# EAGLE board Template_PiggyBack (EAGLE 9.6.2)
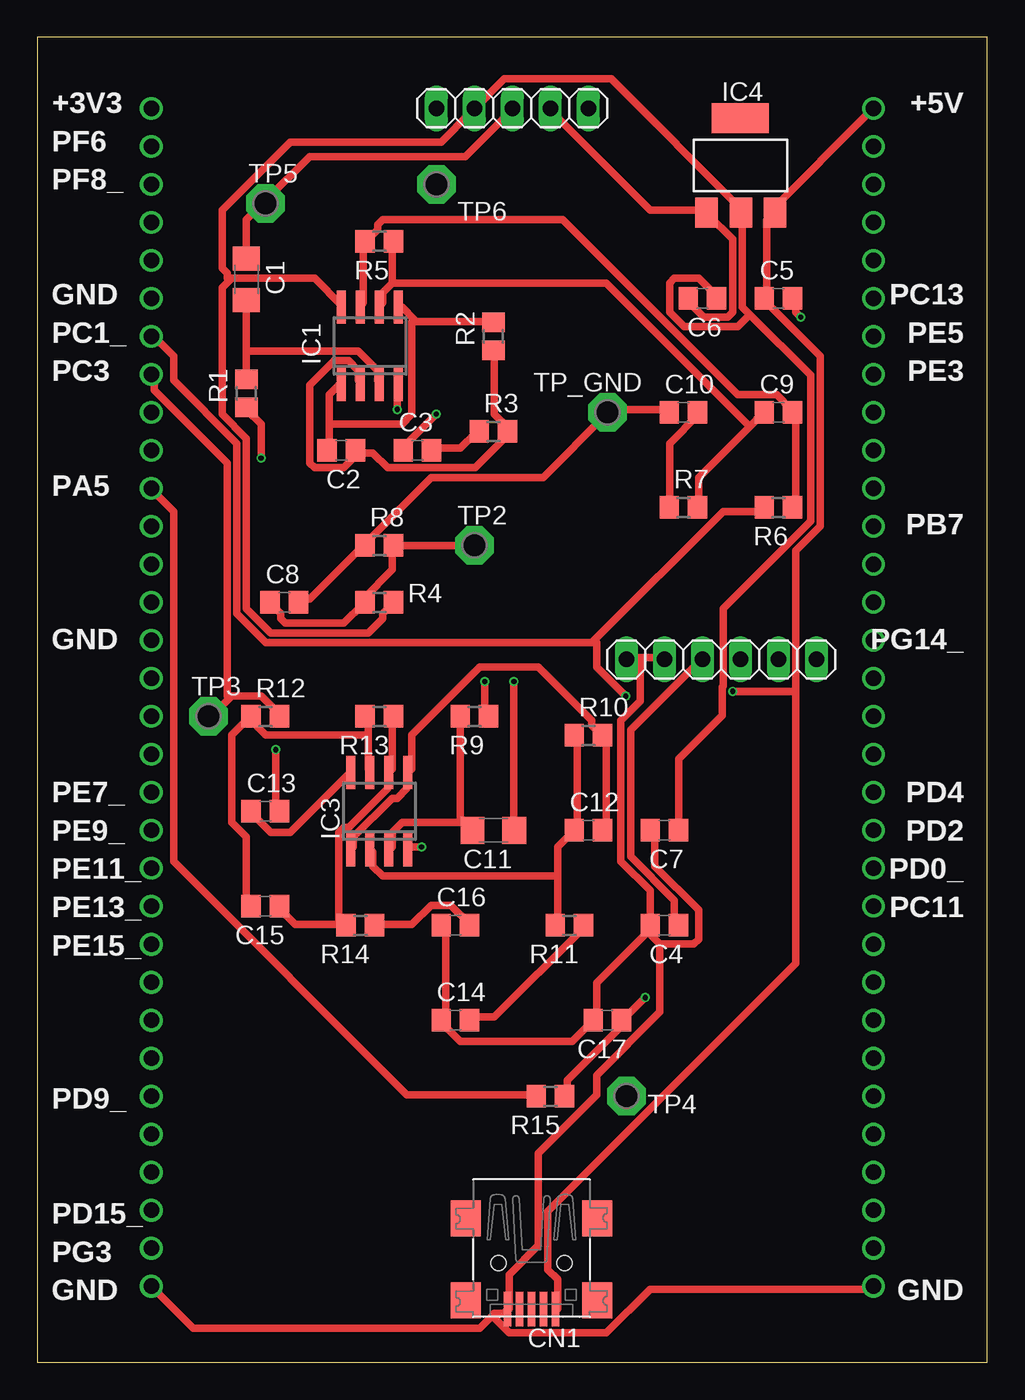
[diagram p0: board, top side]
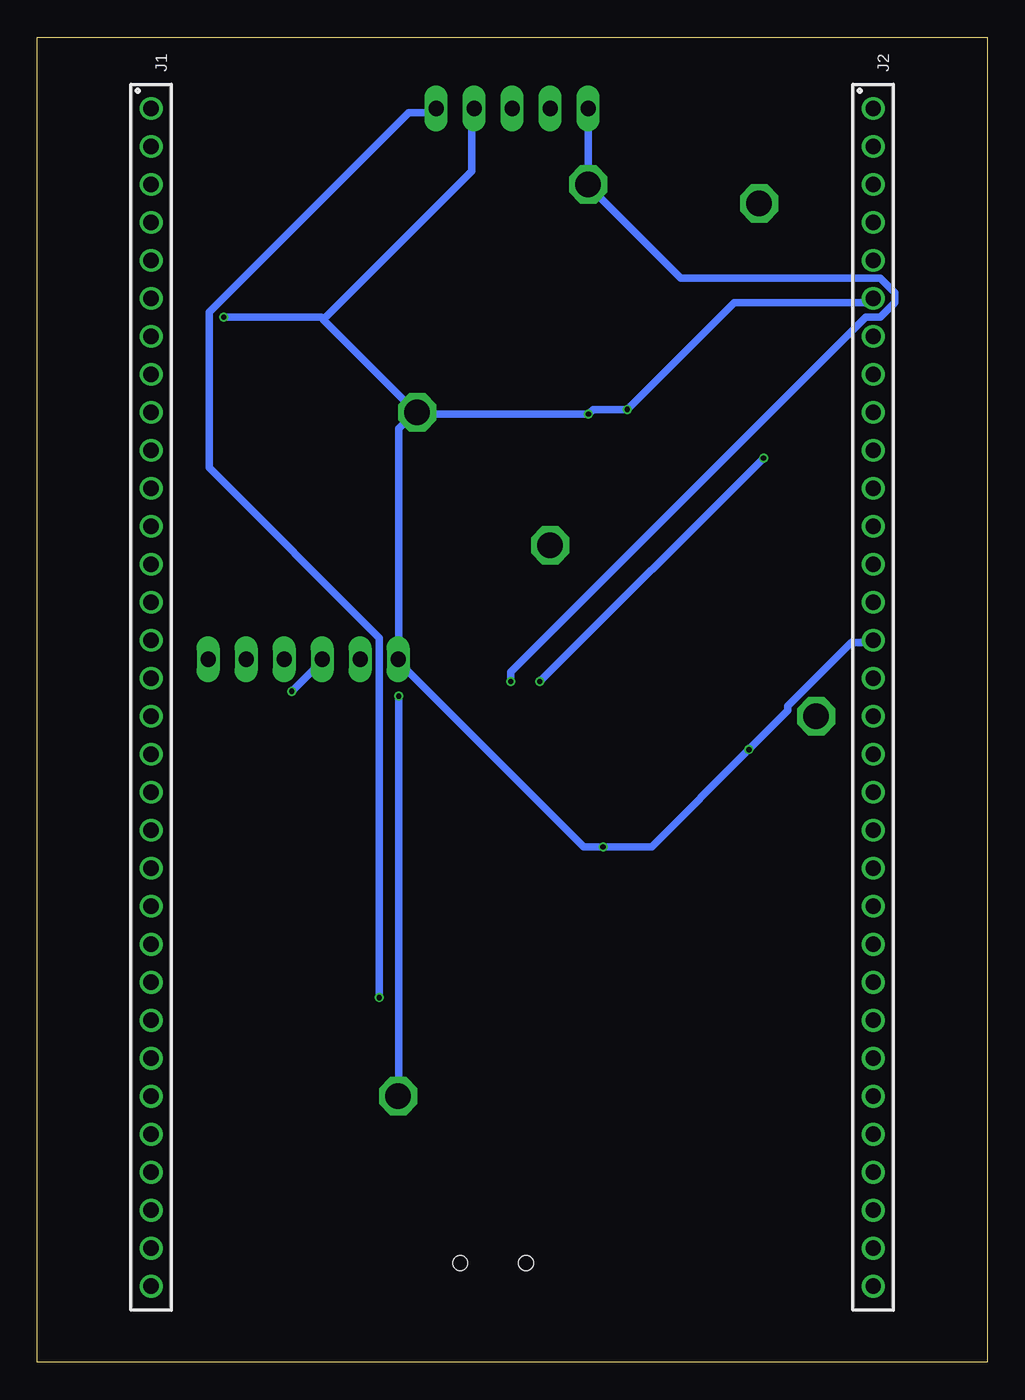
[diagram p1: board, bottom side, seen from below]

Size 63.48 x 88.57 mm. Coordinates in mm from the lower left corner, seen from the top.
Outline: 0,0 63.48,0 63.48,88.57 0,88.57 0,0
Copper layers (1*16): Top 0.018mm / dielectric 1.55mm / Bottom 0.018mm
Design rules "default *": minimum track width 0.5mm, minimum drill 0.35mm, track to track 0.15mm, track to pad 0.15mm, pad to pad 0.15mm, via to via 0.15mm, smd to smd 0mil, copper to edge 0.25mm, drill to drill 0.35mm, minimum pad ring 0.175mm, minimum via ring 0.125mm, stop-mask expansion 0mil, vias tented up to drill 0.45mm, thermal gap 0.2mm
bKeepout: area 3.8,3.8 to 5.8,85.1; area 57.7,3.8 to 59.7,85.1

## Footprints (pad centres in the part's own frame; a part is rotated, then mirrored left to right if it is on the bottom)
C1206 = smd 1.6 x 1.8: 1 -1.4,0; 2 1.4,0
C0805 = smd 1.3 x 1.5: 1 -0.95,0; 2 0.95,0
USB-MINIB = smd 0.5 x 2.308: D+ 0,4.064; D- -0.8,4.064; GND 1.6,4.064; ID 0.8,4.064; VBUS -1.6,4.064 | smd 2 x 2.4: GND1 -4.4,-2; GND2 -4.4,3.5; GND3 4.4,3.5; GND4 4.4,-2 | hole 1: -2.2,1; 2.2,1
SO08 = smd 0.6 x 2.2: 1 -1.905,-2.6; 2 -0.635,-2.6; 3 0.635,-2.6; 4 1.905,-2.6; 5 1.905,2.6; 6 0.635,2.6; 7 -0.635,2.6; 8 -1.905,2.6
SOT223 = smd 1.499 x 2.007: 1 -2.261,-3.15; 2 0.025,-3.15; 3 2.311,-3.15 | smd 3.81 x 2.007: 4 0,3.15
61303211821 = drill 1.02: 1 -39.37,0; 2 -36.83,0; 3 -34.29,0; 4 -31.75,0; 5 -29.21,0; 6 -26.67,0; 7 -24.13,0; 8 -21.59,0; 9 -19.05,0; 10 -16.51,0; 11 -13.97,0; 12 -11.43,0; 13 -8.89,0; 14 -6.35,0; 15 -3.81,0; 16 -1.27,0; 17 1.27,0; 18 3.81,0; 19 6.35,0; 20 8.89,0; 21 11.43,0; 22 13.97,0; 23 16.51,0; 24 19.05,0; 25 21.59,0; 26 24.13,0; 27 26.67,0; 28 29.21,0; 29 31.75,0; 30 34.29,0; 31 36.83,0; 32 39.37,0
1X05 = drill 1.016 long: 1 -5.08,0; 2 -2.54,0; 3 0,0; 4 2.54,0; 5 5.08,0
1X06 = drill 1.016 long: 1 -6.35,0; 2 -3.81,0; 3 -1.27,0; 4 1.27,0; 5 3.81,0; 6 6.35,0
R0805 = smd 1.3 x 1.5: 1 -0.95,0; 2 0.95,0
P1-17 = drill 1.702 pad 2.54 octagon: TP 0,0

## Placement (x,y rotation side)
C1  22n  [C1206]  13.97,72.39 270 top
C2  4.7n  [C0805]  20.32,60.96 180 top
C3  22µ  [C0805]  25.4,60.96 0 top
C4  1u  [C0805]  41.91,29.21 180 top
C5  10u  [C0805]  49.53,71.12 0 top
C6  10u  [C0805]  44.45,71.12 180 top
C7  100n  [C0805]  41.91,35.56 180 top
C8  10µ  [C0805]  16.51,50.8 0 top
C9  4.7n  [C0805]  49.53,63.5 0 top
C10  22µ  [C0805]  43.18,63.5 0 top
C11  22n  [C1206]  30.48,35.56 180 top
C12  4.7n  [C0805]  36.83,35.56 0 top
C13  100n  [C0805]  15.24,36.83 0 top
C14  22µ  [C0805]  27.94,22.86 0 top
C15  4.7n  [C0805]  15.24,30.48 180 top
C16  22µ  [C0805]  27.94,29.21 0 top
C17  1u  [C0805]  38.1,22.86 180 top
CN1  USB power supply  [USB-MINIB]  33.02,7.62 180 top
IC1  MCP6002  [SO08]  22.23,67.94 0 top
IC3  MCP6002  [SO08]  22.86,36.83 0 top
IC4  REG1117  [SOT223]  46.99,80.01 0 top
J1  [61303211821]  55.88,44.45 270 bottom
J2  [61303211821]  7.62,44.45 270 bottom
JP5  Radar K-LC5-RFB-00C  [1X05]  31.75,83.82 0 top
JP8  OpenLog extension  [1X06]  45.72,46.99 180 top
R1  100k  [R0805]  13.97,64.77 90 top
R2  3.3k  [R0805]  30.48,68.58 90 top
R3  100  [R0805]  30.48,62.23 0 top
R4  3k  [R0805]  22.86,50.8 0 top
R5  3.3k  [R0805]  22.86,74.93 180 top
R6  100  [R0805]  49.53,57.15 180 top
R7  100  [R0805]  43.18,57.15 0 top
R8  3k  [R0805]  22.86,54.61 0 top
R9  100k  [R0805]  29.21,43.18 180 top
R10  3.3k  [R0805]  36.83,41.91 0 top
R11  100  [R0805]  35.56,29.21 180 top
R12  100  [R0805]  15.24,43.18 0 top
R13  3.3k  [R0805]  22.86,43.18 180 top
R14  100  [R0805]  21.59,29.21 180 top
R15  3k  [R0805]  34.29,17.78 180 top
TP2  PTR1PAD1-17  [P1-17]  29.21,54.61 0 top
TP3  PTR1PAD1-17  [P1-17]  11.43,43.18 0 top
TP4  PTR1PAD1-17  [P1-17]  39.37,17.78 0 top
TP5  PTR1PAD1-17  [P1-17]  15.24,77.47 0 top
TP6  PTR1PAD1-17  [P1-17]  26.67,78.74 0 top
TP_GND  PTR1PAD1-17  [P1-17]  38.1,63.5 0 top

## Library data of the parts
C1-C17 = rcl; SPICEPREFIX: C
CN1 = adafruit
IC1 IC3 = linear
IC4 = burr-brown; MPN: REG1117; OC_FARNELL: 1097566; OC_NEWARK: 14P6981
J1 J2 = Wurth_Connectors_WR-PHD; DATASHEET-URL: https://katalog.we-online.com/em/datasheet/61303211821.pdf; GENDER: Socket Header; IR: 3A; MATES: WR-PHD 2.54mm SMT Pin Header/THT Angled Pin Header/THT Pin Header; PACKAGING: Tray; PART-NUMBER: 61303211821; PINS: 32; ROWS: Single; TYPE: Straight
JP5 JP8 = pinhead
R1-R15 = rcl; SPICEPREFIX: R
TP2-TP6 TP_GND = testpad

## Nets
+3.3V_FROM_UC: J2.1
+3V3: C6.1 C7.1 IC1.8 IC4.2 JP5.2 R4.2
+5V: C4.1 C5.1 CN1.VBUS IC4.3 J1.1 JP8.4
GND: C3.1 C4.2 C5.2 C6.2 C7.2 C8.2 C10.1 C13.2 C14.1 C16.1 C17.2 CN1.GND IC1.4 IC3.4 IC4.1 J1.32 J2.6 J2.15 J2.32 JP5.4 JP8.5 JP8.6 R8.1 TP_GND.TP
IF_I: C1.1 JP5.3 TP5.TP
IF_Q: C11.1 JP5.1 TP6.TP
N$1: C3.2 R3.1
N$2: C2.1 IC1.2 R2.1 R3.2
N$3: C10.2 R7.1
N$4: C1.2 IC1.3 R1.2
N$5: C2.2 IC1.1 IC1.5 R2.2
N$6: C8.1 R4.1 R8.2 TP2.TP
N$7: C9.2 IC1.7 R5.2 R6.1
N$8: C9.1 IC1.6 R5.1 R7.2
N$9: C12.1 IC3.2 R10.1 R11.2
N$10: C16.2 R14.1
N$11: C11.2 IC3.3 R9.2
N$12: C12.2 IC3.1 IC3.5 R10.2
N$13: C15.2 IC3.7 R12.1 R13.2
N$14: C15.1 IC3.6 R13.1 R14.2
N$15: C14.2 R11.1
PA5: J2.11 R15.2
PA9: JP8.2
PA10: JP8.3
PB7: J1.12
PC1_: J2.7 R6.2 TP4.TP
PC3: J2.8 R12.2 TP3.TP
PC11: J1.22
PC13: J1.6
PD0_: J1.21
PD2: J1.20
PD4: J1.19
PD9_: J2.27
PD15_: J2.30
PE3: J1.8
PE5: J1.7
PE6: JP8.1
PE7_: J2.19
PE9_: J2.20
PE11_: J2.21
PE13_: J2.22
PE15_: J2.23
PF6: J2.2
PF8_: J2.3
PG3: J2.31
PG14_: J1.15
V_GND: R1.1 R9.1
VCC: C13.1 IC3.8
VCO: C17.1 JP5.5 R15.1

## Tracks (layer width: path | path; a pad name or v marks a point on that pad's centre or on a via)
+3V3
  Top 0.5: 12.84,72.31 13,72.47 18.52,72.47 20.32,70.68 IC1.8 | 12.84,72.31 12.35,71.83 12.35,63.38 13.97,61.75 13.97,50.38 15.6,48.75 22.1,48.75 23.07,49.73 23.07,50.05 23.73,50.7 R4.2 | 47.61,70.04 47.12,70.53 47.12,76.7 IC4.2 47.12,77.03 38.35,85.8 31.2,85.8 29.25,83.85 JP5.2 28.93,83.53 26.98,81.58 16.9,81.58 12.35,77.03 12.35,73.12 12.68,72.8 12.68,72.47 12.84,72.31 | 47.61,70.04 51.67,65.97 51.67,56.23 45.83,50.38 45.83,45.19 45.77,45.14 45.77,43.23 42.86,40.32 C7.1 | 47.61,70.04 46.8,69.22 43.23,69.22 42.25,70.2 42.25,72.15 42.58,72.47 44.2,72.47 45.17,71.5 45.17,71.17 C6.1
+5V  (via drill 0.35)
  Top 0.5: C4.1 42.58,29.25 42.58,30.88 39.65,33.8 39.65,42.25 44.2,46.8 JP8.4 | 50.7,44.85 50.7,54.27 52.33,55.9 52.33,67.28 48.75,70.85 C5.1 48.75,71.17 48.75,76.38 49.08,76.7 IC4.3 49.08,77.03 55.58,83.53 J1.1 | 50.7,44.85 50.7,26.65 34.12,10.07 34.12,6.17 34.77,5.53 34.77,3.58 CN1.VBUS | 50.7,44.85 v46.48,44.85
  Bottom 0.5: v46.48,44.85 44.52,46.8 JP8.4
GND  (via drill 0.35)
  Top 0.5: 30.39,3.09 29.57,2.27 10.4,2.27 7.8,4.88 J2.32 | 30.39,3.09 30.55,3.25 31.2,3.25 CN1.GND 31.52,3.58 31.52,5.85 33.48,7.8 33.48,13.97 37.38,17.88 37.38,19.18 41.6,23.4 41.6,27.95 | 30.39,3.09 31.52,1.95 38.02,1.95 40.95,4.88 55.58,4.88 J1.32 | v15.93,40.95 15.93,37.05 C13.2 | v25.68,34.45 25.02,34.45 IC3.4 | C16.1 27.3,28.93 27.3,23.07 C14.1 27.3,22.75 27.3,22.43 28.27,21.45 35.75,21.45 37.05,22.75 C17.2 37.38,23.07 37.38,25.35 40.95,28.93 C4.2 | 41.6,27.95 43.88,27.95 44.2,28.27 44.2,30.23 41.27,33.15 41.27,35.42 C7.2 | 41.6,27.95 40.95,28.6 C4.2 | C6.2 43.55,70.85 44.52,69.88 46.15,69.88 46.48,70.2 46.48,75.08 44.85,76.7 IC4.1 44.52,77.03 40.95,77.03 34.45,83.53 JP5.4 | C8.2 17.55,51.02 18.2,51.02 21.77,54.6 R8.1 22.1,54.92 26.32,59.15 33.8,59.15 38.02,63.38 TP_GND.TP 38.35,63.7 41.92,63.7 C10.1 | 40.3,47.12 41.6,47.12 JP8.5 | 40.3,47.12 39.65,47.12 JP8.6 | v26.65,63.38 24.7,61.42 24.7,61.1 C3.1 | v51.02,69.88 50.7,70.2 50.7,70.85 C5.2 | v24.05,63.7 24.05,65.33 IC1.4 | 40.3,47.12 40.3,44.2 39,42.9 39,33.48 40.95,31.52 40.95,29.25 C4.2
  Bottom 0.5: J2.15 7.8,48.1 9.1,48.1 13.32,43.88 13.32,43.55 v15.93,40.95 22.43,34.45 v25.68,34.45 26.98,34.45 39.33,46.8 JP8.6 39.33,47.12 39.33,62.4 38.35,63.38 TP_GND.TP | TP_GND.TP 38.02,63.38 v26.65,63.38 26.32,63.7 v24.05,63.7 16.9,70.85 7.8,70.85 J2.6 | v51.02,69.88 44.52,69.88 44.36,69.71 | 44.36,69.71 38.35,63.7 TP_GND.TP | 44.36,69.71 34.45,79.62 34.45,83.53 JP5.4
IF_I
  Top 0.5: C1.1 13.97,74.1 13.97,76.38 14.95,77.35 TP5.TP 15.28,77.67 18.2,80.6 28.6,80.6 31.52,83.53 JP5.3
IF_Q  (via drill 0.35)
  Top 0.5: v31.85,45.5 31.85,35.75 C11.1
  Bottom 0.5: v31.85,45.5 31.85,46.15 8.12,69.88 7.15,69.88 6.17,70.85 6.17,71.5 7.15,72.47 20.48,72.47 26.65,78.65 TP6.TP 26.65,78.97 26.65,83.53 JP5.1
N$1
  Top 0.5: C3.2 26.65,61.1 28.27,61.1 29.25,62.08 R3.1
N$2
  Top 0.5: 21.45,60.77 22.43,60.77 23.4,59.8 29.25,59.8 31.52,62.08 R3.2 31.52,62.4 30.55,63.38 30.55,67.6 R2.1 | 21.45,60.77 20.48,59.8 18.52,59.8 18.2,60.12 18.2,65.33 19.82,66.95 20.8,66.95 21.45,66.3 21.45,65.65 IC1.2 | 21.45,60.77 C2.1
N$3
  Top 0.5: R7.1 42.25,57.2 42.25,61.42 44.2,63.38 C10.2
N$4
  Top 0.5: 13.97,67.6 13.97,70.85 C1.2 | 13.97,67.6 13.97,65.97 R1.2 | 13.97,67.6 21.45,67.6 22.75,66.3 22.75,65.65 IC1.3
N$5
  Top 0.5: 19.5,62.73 19.5,64.67 20.15,65.33 IC1.1 | 19.5,62.73 19.5,61.1 C2.2 | 25.19,69.71 24.38,70.53 IC1.5 | 25.19,69.71 25.35,69.55 30.23,69.55 R2.2 | 19.5,62.73 24.38,62.73 25.02,63.38 25.02,69.55 25.19,69.71
N$6
  Top 0.5: C8.1 15.6,50.7 16.25,50.05 16.25,49.73 16.57,49.4 20.48,49.4 21.77,50.7 R4.1 21.77,51.02 23.73,52.98 23.73,54.6 R8.2 24.05,54.6 28.93,54.6 TP2.TP
N$7
  Top 0.5: IC1.7 21.77,70.85 21.77,74.75 R5.2 22.1,75.08 22.75,75.72 22.75,76.05 23.07,76.38 35.1,76.38 46.8,64.67 49.4,64.67 50.38,63.7 C9.2 50.7,63.38 50.7,57.2 R6.1
N$8
  Top 0.5: 23.73,72.15 23.73,74.75 R5.1 | 23.73,72.15 23.07,71.5 23.07,70.85 IC1.6 | 47.61,62.56 48.42,63.38 C9.1 | 47.61,62.56 44.2,59.15 44.2,57.2 R7.2 | 23.73,72.15 38.02,72.15 47.61,62.56
N$9
  Top 0.5: 34.77,32.5 34.77,34.45 35.75,35.42 C12.1 36.08,35.75 36.08,41.6 R10.1 | 34.77,32.5 34.77,29.25 R11.2 | 34.77,32.5 23.07,32.5 22.43,33.15 22.43,34.12 IC3.2
N$10
  Top 0.5: R14.1 22.75,29.25 25.02,29.25 26.32,30.55 27.62,30.55 28.93,29.25 C16.2
N$11
  Top 0.5: 28.44,36.24 28.93,35.75 C11.2 | 28.44,36.24 28.27,36.4 28.27,42.9 R9.2 | IC3.3 23.73,34.45 23.73,35.42 24.38,36.08 28.27,36.08 28.44,36.24
N$12
  Top 0.5: C12.2 38.02,35.75 38.02,41.6 R10.2 37.7,41.92 37.05,42.58 37.05,42.9 33.48,46.48 29.57,46.48 25.02,41.92 25.02,39.65 IC3.5 24.7,39.33 24.7,38.35 24.05,37.7 23.73,37.7 21.12,35.1 21.12,34.45 IC3.1
N$13
  Top 0.5: 22.1,41.92 22.1,39.65 IC3.7 | 22.1,41.92 22.1,42.9 R13.2 | C15.2 13.97,30.55 13.97,35.1 13,36.08 13,41.92 13.97,42.9 R12.1 14.3,42.9 15.28,41.92 22.1,41.92
N$14
  Top 0.5: R13.1 23.73,42.9 23.73,39.65 IC3.6 23.4,39.33 23.4,38.35 20.8,35.75 20.48,35.75 20.15,35.42 20.15,29.25 | 20.15,29.25 17.23,29.25 16.25,30.23 C15.1 | 20.15,29.25 20.48,29.25 R14.2 20.15,29.25
N$15
  Top 0.5: C14.2 28.93,23.07 30.55,23.07 36.4,28.93 R11.1
PA5
  Top 0.5: R15.2 33.15,17.88 24.7,17.88 9.1,33.48 9.1,56.88 7.8,58.17 J2.11
PC1_  (via drill 0.35)
  Top 0.5: 37.21,48.26 37.05,48.1 15.28,48.1 13.32,50.05 13.32,61.42 9.1,65.65 9.1,67.28 7.8,68.58 J2.7 | 37.21,48.26 45.83,56.88 48.42,56.88 R6.2 | v39.33,44.52 37.38,46.48 37.38,48.1 37.21,48.26
  Bottom 0.5: v39.33,44.52 39.33,17.88 TP4.TP
PC3
  Top 0.5: 12.84,44.36 11.7,43.23 TP3.TP | 12.84,44.36 13,44.52 14.95,44.52 15.93,43.55 15.93,43.23 R12.2 | J2.8 7.8,65.97 7.8,65 12.68,60.12 12.68,44.52 12.84,44.36
V_GND  (via drill 0.35)
  Top 0.5: v29.9,45.5 29.9,43.23 R9.1 | v14.95,60.45 14.95,62.73 13.97,63.7 R1.1
  Bottom 0.5: v14.95,60.45 v29.9,45.5
VCC
  Top 0.5: C13.1 14.3,36.73 15.6,35.42 16.9,35.42 20.8,39.33 IC3.8
VCO  (via drill 0.35)
  Top 0.5: R15.1 35.42,17.88 35.42,18.85 39.33,22.75 C17.1 39.33,23.07 v40.62,24.38
  Bottom 0.5: v40.62,24.38 40.62,48.42 52,59.8 52,70.2 38.67,83.53 37.05,83.53 JP5.5

## Text on the board
tNames: +3V3 / PF6 / PF8_ / / / GND / PC1_ / PC3 / / / PA5 / / / / GND / / / / PE7_ / PE9_ / PE11_ / PE13_ / PE15_ / / / / PD9_ / / / PD15_ / PG3 / GND | +5V / / / / / PC13 / PE5 / PE3 / / / / PB7 / / / PG14_ / / / / PD4 / PD2 / PD0_ / PC11 / / / / / / / / / / GND